# EAGLE board eccosorb_filter_v1-xld250 (EAGLE 9.3.0)
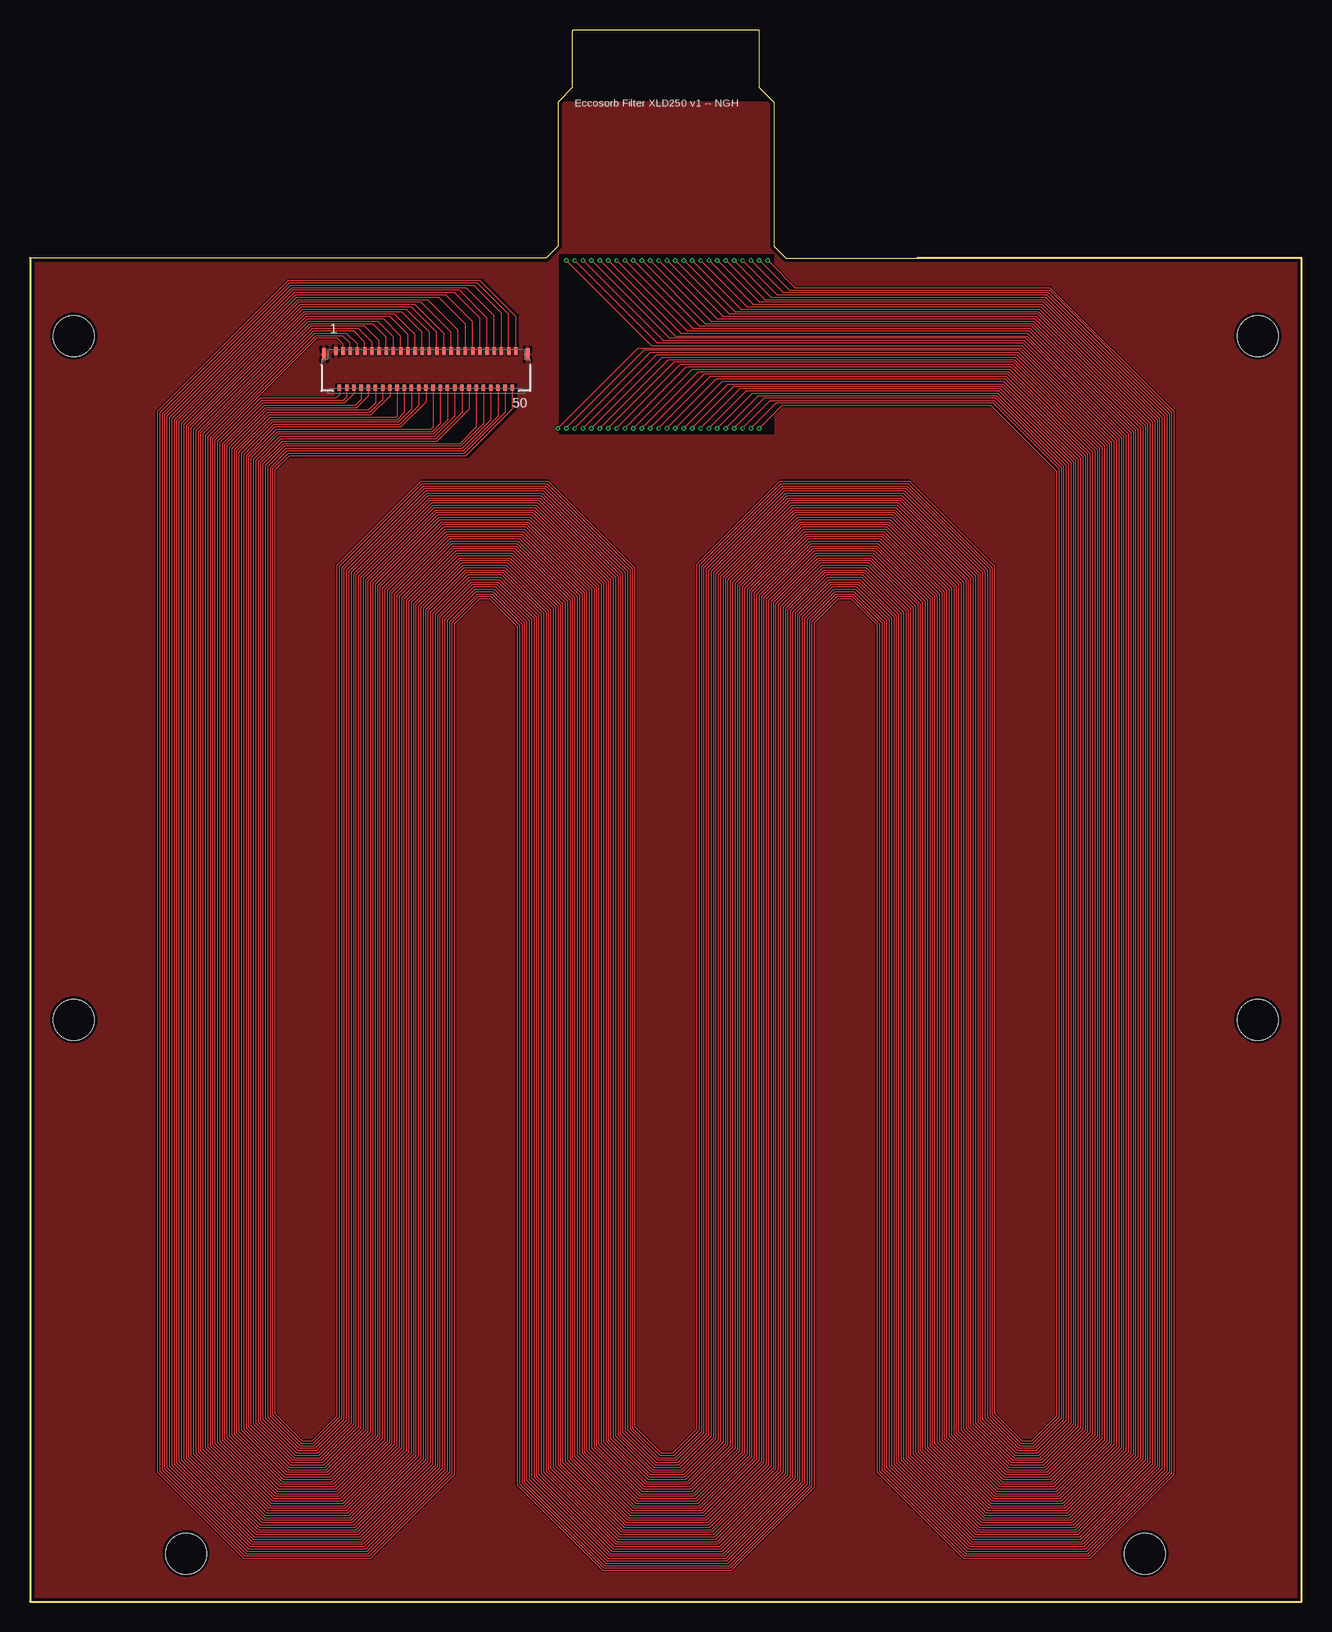
[diagram p0: board, top side]
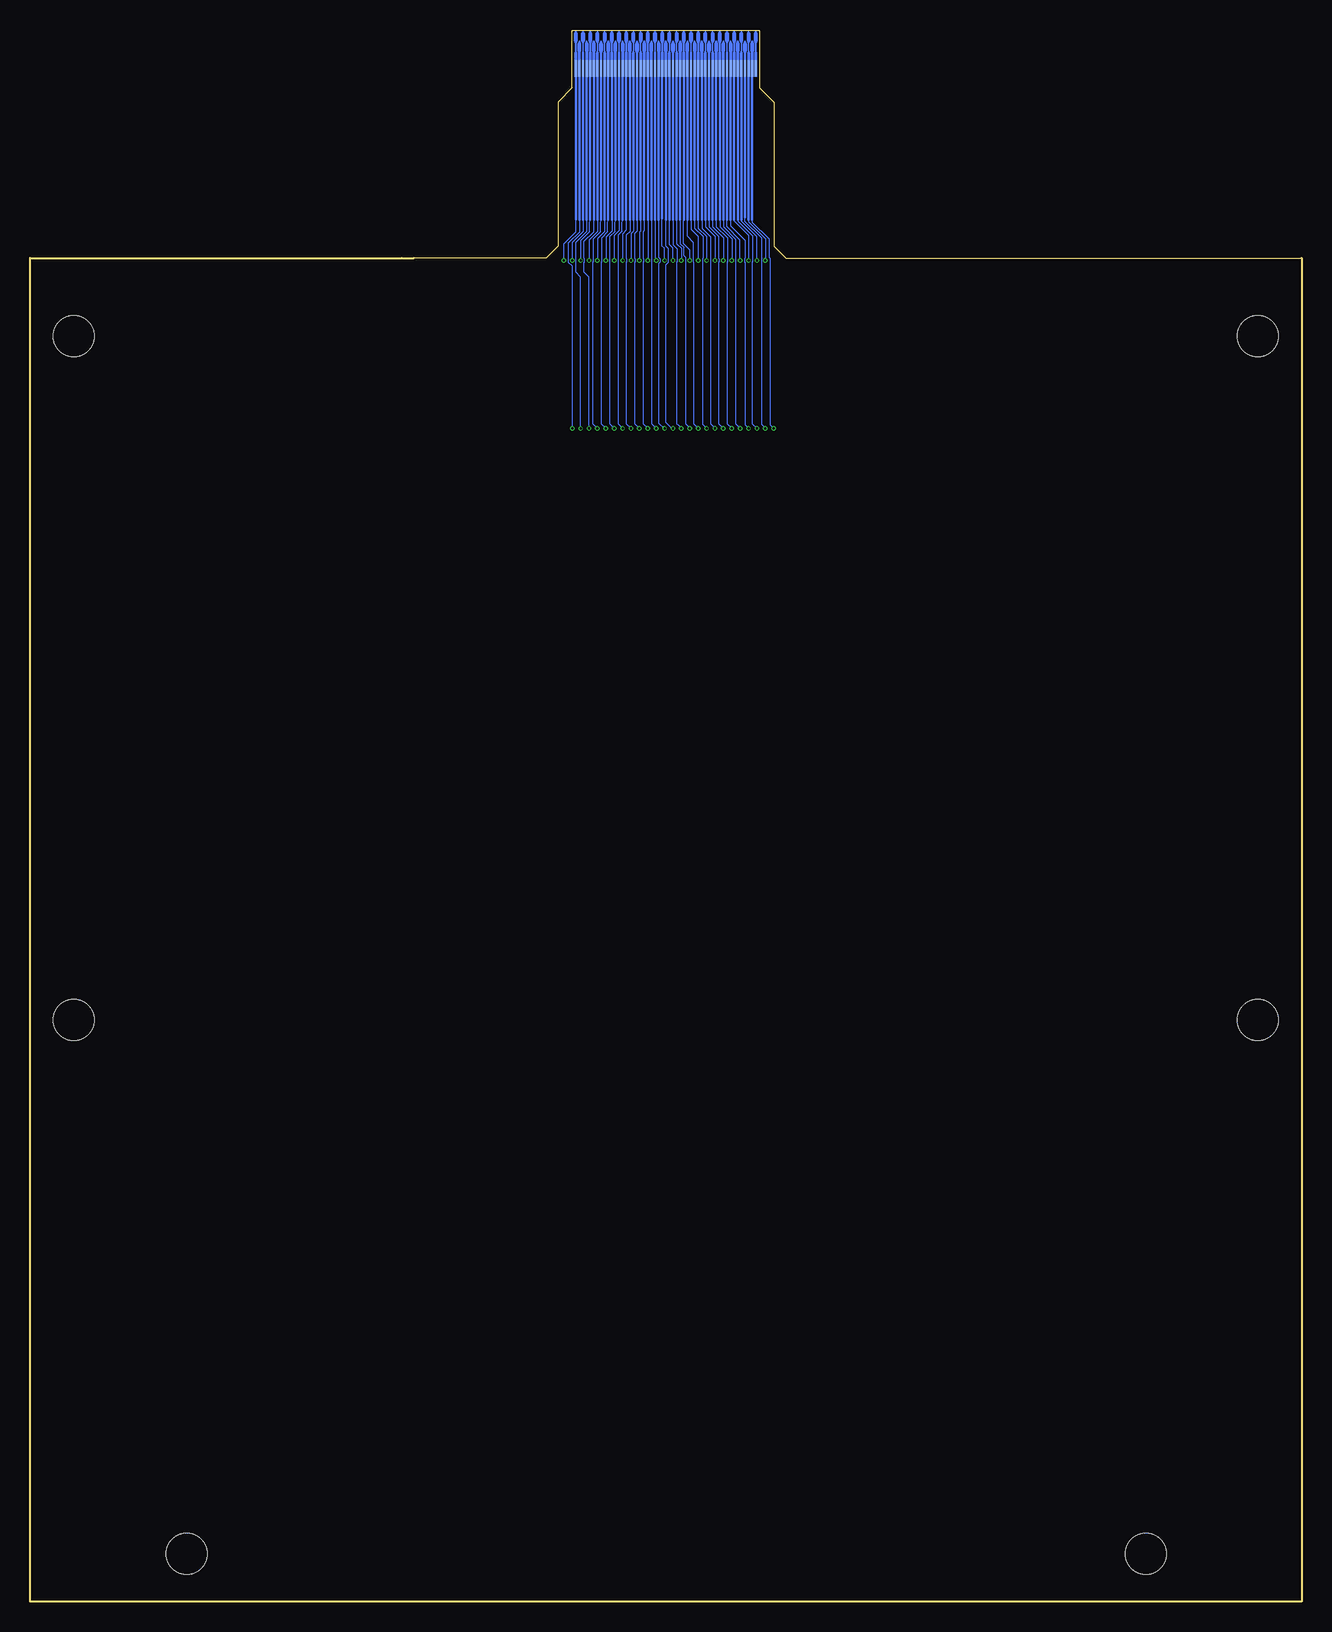
[diagram p1: board, bottom side, seen from below]

Size 106 x 131 mm. Coordinates in mm from the lower left corner, seen from the top.
Outline: 75,112 106,112 106,0 0,0 0,112 43,112 44,113 44,125 45.2,126.2 45.2,130.9 45.3,131 60.7,131 60.8,130.9 60.8,126.2 62,125 62,113 63,112 75,112
Outline: 75,112 74,112
Copper layers ((1*2)+(15*16)): Top 0.048259375mm / dielectric 0.18288125mm / Route2 0.035559375mm / dielectric 39mil / Route15 0.035559375mm / dielectric 0.18288125mm / Bottom 0.048259375mm
Design rules "default *": minimum track width 0.1mm, minimum drill 0.2mm, track to track 0.1mm, track to pad 0.1mm, pad to pad 0.1mm, via to via 0.1mm, smd to smd 0.1mm, copper to edge 10mil, drill to drill 10mil, minimum pad ring 3mil, minimum via ring 3mil, stop-mask expansion 4mil, vias tented up to drill 16mil, thermal gap 10mil
Net classes: 0 default: width 0.1 mm, drill 0.2 mm, clearance 0.1 mm
Holes 3.4 mm at 3.65,105.5 102.35,105.5 102.35,48.5 92.95,4 13,4 3.65,48.5
tRestrict: area 44.1,97.3 to 62,112.3; area 26,104.7 to 40.7,110.2; area 25.5,95.4 to 40.5,101.5
bRestrict: area 44.1,97.3 to 62,112.3

## Footprints (pad centres in the part's own frame; a part is rotated, then mirrored left to right if it is on the bottom)
MOLEX_502598-5193_0 = smd 0.3 x 0.67: 1 -7.5,-1.532; 3 -6.9,-1.532; 5 -6.3,-1.532; 7 -5.7,-1.532; 9 -5.1,-1.532; 11 -4.5,-1.532; 13 -3.9,-1.532; 15 -3.3,-1.532; 17 -2.7,-1.532; 19 -2.1,-1.532; 21 -1.5,-1.532; 23 -0.9,-1.532; 25 -0.3,-1.532; 27 0.3,-1.532; 29 0.9,-1.532; 31 1.5,-1.532; 33 2.1,-1.532; 35 2.7,-1.532; 37 3.3,-1.532; 39 3.9,-1.532; 41 4.5,-1.532; 43 5.1,-1.532; 45 5.7,-1.532; 47 6.3,-1.532; 49 6.9,-1.532; 51 7.5,-1.532 | smd 0.3 x 0.5: 2 -7.2,1.532; 4 -6.6,1.532; 6 -6,1.532; 8 -5.4,1.532; 10 -4.8,1.532; 12 -4.2,1.532; 14 -3.6,1.532; 16 -3,1.532; 18 -2.4,1.532; 20 -1.8,1.532; 22 -1.2,1.532; 24 -0.6,1.532; 26 0,1.532; 28 0.6,1.532; 30 1.2,1.532; 32 1.8,1.532; 34 2.4,1.532; 36 3,1.532; 38 3.6,1.532; 40 4.2,1.532; 42 4.8,1.532; 44 5.4,1.532; 46 6,1.532; 48 6.6,1.532; 50 7.2,1.532 | smd 0.35 x 1: MP1 -8.475,-1.267; MP2 8.475,-1.267
MOLEX_502598-5193-JUMPER = smd 0.2 x 1.4: 1 -7.5,-3.2; 2 -7.2,-3.2; 3 -6.9,-3.2; 4 -6.6,-3.2; 5 -6.3,-3.2; 6 -6,-3.2; 7 -5.7,-3.2; 8 -5.4,-3.2; 9 -5.1,-3.2; 10 -4.8,-3.2; 11 -4.5,-3.2; 12 -4.2,-3.2; 13 -3.9,-3.2; 14 -3.6,-3.2; 15 -3.3,-3.2; 16 -3,-3.2; 17 -2.7,-3.2; 18 -2.4,-3.2; 19 -2.1,-3.2; 20 -1.8,-3.2; 21 -1.5,-3.2; 22 -1.2,-3.2; 23 -0.9,-3.2; 24 -0.6,-3.2; 25 -0.3,-3.2; 26 0,-3.2; 27 0.3,-3.2; 28 0.6,-3.2; 29 0.9,-3.2; 30 1.2,-3.2; 31 1.5,-3.2; 32 1.8,-3.2; 33 2.1,-3.2; 34 2.4,-3.2; 35 2.7,-3.2; 36 3,-3.2; 37 3.3,-3.2; 38 3.6,-3.2; 39 3.9,-3.2; 40 4.2,-3.2; 41 4.5,-3.2; 42 4.8,-3.2; 43 5.1,-3.2; 44 5.4,-3.2; 45 5.7,-3.2; 46 6,-3.2; 47 6.3,-3.2; 48 6.6,-3.2; 49 6.9,-3.2; 50 7.2,-3.2; 51 7.5,-3.2

## Placement (x,y rotation side)
J2  MOLEX_502598-5193MOLEX_502598-5193_0_0  [MOLEX_502598-5193_0]  33,102.7 180 top
U$1  502598-5193_JUMPER  [MOLEX_502598-5193-JUMPER]  53,131 0 bottom

## Library data of the parts
J2 = Molex - 502598-5193; CIIVA_IDS: 8412513; CIRCUITS_LOADED: 51; COMPONENT_LINK_1_DESCRIPTION: Manufacturer URL; COMPONENT_LINK_1_URL: http://www.molex.com/molex/index.jsp; COMPONENT_LINK_3_DESCRIPTION: Package Specification; COMPONENT_LINK_3_URL: http://www.molex.com/pdm_docs/sd/5025985193_sd.pdf; CONTACT_POSITION: Dual; CURRENT_MAX_PER_CONTACT: 0.2A; DATASHEET: http://www.molex.com/webdocs/datasheets/pdf/en-us/5025985193_FFC_FPC_CONNECTORS.pdf; DURABILITY_MATING_CYCLES_MAX: 10; ENTRY_ANGLE: 90degrees Angle; FOOTPRINT_VARIANT_NAME_0: Manufacturer Recommended; IMPORTED: yes; IMPORTED_FROM: vault; IMPORT_TS: 1521860080; MATED_HEIGHT: 1.15mm; MATERIAL___METAL: Copper Alloy, Phosphor Bronze; MATERIAL___PLATING_MATING: Gold; MATERIAL___PLATING_TERMINATION: Gold, Tin; MF: Molex; MOUNTING_TECHNOLOGY: Surface Mount; MPN: 502598-5193; NUMBER_OF_ROWS: 1; ORIENTATION: Right Angle; PACKAGE: 502598-5193; PACKAGE_DESCRIPTION: 51-Lead FPC Connector, Pitch 0.3 mm; PACKAGE_VERSION: Rev. B, 08/2013; PACKING: Tape and Reel; PCB_LOCATOR: No; PCB_RETENTION: Yes; PITCH___MATING_INTERFACE: 0.30mm; POLARIZED_TO_PCB: Yes; PREFIX: J; RELEASE_DATE: 1411372322; ROHS: Yes; STACKABLE: No; VAULT_GUID: 79943B7E-3FDB-4B6C-B1B1-74E826A886CC; VAULT_REVISION: 2B392736-9C86-4257-9195-559BF0CEA94B; VOLTAGE_MAX: 50V AC (RMS)/DC
U$1 = molex_502598-5193-card

## Nets
2: J2.50 U$1.50
3: J2.49 U$1.49
4: J2.48 U$1.48
5: J2.47 U$1.47
6: J2.46 U$1.46
7: J2.45 U$1.45
8: J2.44 U$1.44
9: J2.43 U$1.43
10: J2.42 U$1.42
11: J2.41 U$1.41
12: J2.40 U$1.40
13: J2.39 U$1.39
14: J2.38 U$1.38
15: J2.37 U$1.37
16: J2.36 U$1.36
17: J2.35 U$1.35
18: J2.34 U$1.34
19: J2.33 U$1.33
20: J2.32 U$1.32
21: J2.31 U$1.31
22: J2.30 U$1.30
23: J2.29 U$1.29
24: J2.28 U$1.28
25: J2.27 U$1.27
26: J2.26 U$1.26
27: J2.25 U$1.25
28: J2.24 U$1.24
29: J2.23 U$1.23
30: J2.22 U$1.22
31: J2.21 U$1.21
32: J2.20 U$1.20
33: J2.19 U$1.19
34: J2.18 U$1.18
35: J2.17 U$1.17
36: J2.16 U$1.16
37: J2.15 U$1.15
38: J2.14 U$1.14
39: J2.13 U$1.13
40: J2.12 U$1.12
41: J2.11 U$1.11
42: J2.10 U$1.10
43: J2.9 U$1.9
44: J2.8 U$1.8
45: J2.7 U$1.7
46: J2.6 U$1.6
47: J2.5 U$1.5
48: J2.4 U$1.4
49: J2.3 U$1.3
50: J2.2 U$1.2
51: J2.1 U$1.1
GND: J2.51 J2.MP1 J2.MP2

## Tracks (layer width: path | path; a pad name or v marks a point on that pad's centre or on a via)
2  (via drill 0.2)
  Top 0.1: J2.50 25.8,100.6 25.5,100.3 19.2,100.3 15.6,96.7 15.6,13.3 20.3,8.6 25.9,8.6 30.4,13.1 30.4,84 35,88.6 40.8,88.6 45.6,83.8 45.6,12.2 50.2,7.6 56,7.6 60.4,12 60.4,84.1 64.9,88.6 70.9,88.6 75.6,83.9 75.6,13.3 80.3,8.6 85.9,8.6 90.4,13.1 90.4,96.7 82.6,104.5 50.7,104.5 v44,97.8
  Bottom 0.1: 45.8,115.2 45.8,115 44.4,113.6 44.4,112.06 44.3,111.96 44.3,111.64 44.3,111.6 44.3,98.1 v44,97.8
  Bottom 0.2: U$1.50 45.8,115.2
3  (via drill 0.2)
  Top 0.1: J2.49 26.1,104.8 25.6,105.3 23.9,105.3 15.4,96.8 15.4,13.2 20.2,8.4 26,8.4 30.6,13 30.6,83.9 35.1,88.4 40.7,88.4 45.4,83.7 45.4,12.1 50.1,7.4 56.1,7.4 60.6,11.9 60.6,84 65,88.4 70.8,88.4 75.4,83.8 75.4,13.2 80.2,8.4 86,8.4 90.6,13 90.6,96.8 82.7,104.7 51.8,104.7 v44.7,111.8
  Bottom 0.1: 46.1,115.2 46.1,115.02 44.7,113.62 v44.7,111.8
  Bottom 0.2: U$1.49 46.1,115.2
4  (via drill 0.2)
  Top 0.1: J2.48 26.4,100.4 26.1,100.1 19.3,100.1 15.8,96.6 15.8,13.4 20.4,8.8 25.8,8.8 30.2,13.2 30.2,84.1 34.9,88.8 40.9,88.8 45.8,83.9 45.8,12.3 50.3,7.8 55.9,7.8 60.2,12.1 60.2,84.2 64.8,88.8 71,88.8 75.8,84 75.8,13.4 80.4,8.8 85.8,8.8 90.2,13.2 90.2,96.6 82.5,104.3 51.2,104.3 v44.7,97.8
  Bottom 0.1: v44.7,97.8 45.03,98.13 45.03,111.94 45,111.96 45,113.63 46.4,115.03 46.4,115.4
  Bottom 0.2: 46.4,115.4 U$1.48
5  (via drill 0.2)
  Top 0.1: J2.47 26.7,104.9 26.1,105.5 23.8,105.5 15.2,96.9 15.2,13.1 20.1,8.2 26.1,8.2 30.8,12.9 30.8,83.8 35.2,88.2 40.6,88.2 45.2,83.6 45.2,12 50,7.2 56.2,7.2 60.8,11.8 60.8,83.9 65.1,88.2 70.7,88.2 75.2,83.7 75.2,13.1 80.1,8.2 86.1,8.2 90.8,12.9 90.8,96.9 82.8,104.9 52.3,104.9 v45.4,111.8
  Bottom 0.1: v45.4,111.8 45.4,113.75 46.7,115.05 46.7,115.2
  Bottom 0.2: 46.7,115.2 U$1.47
6  (via drill 0.2)
  Top 0.1: J2.46 27,100.7 26.2,99.9 19.4,99.9 16,96.5 16,13.5 20.5,9 25.7,9 30,13.3 30,84.2 34.8,89 41,89 46,84 46,12.4 50.4,8 55.8,8 60,12.2 60,84.3 64.7,89 71.1,89 76,84.1 76,13.5 80.5,9 85.7,9 90,13.3 90,96.5 82.4,104.1 51.7,104.1 v45.4,97.8
  Bottom 0.1: 47,115.2 47,115.07 45.77,113.84 45.77,111.66 45.8,111.64 45.8,98.2 v45.4,97.8
  Bottom 0.2: U$1.46 47,115.2
7  (via drill 0.2)
  Top 0.1: J2.45 27.3,104.8 26.4,105.7 23.7,105.7 15,97 15,13 20,8 26.2,8 31,12.8 31,83.7 35.3,88 40.5,88 45,83.5 45,11.9 49.9,7 56.3,7 61,11.7 61,83.8 65.2,88 70.6,88 75,83.6 75,13 80,8 86.2,8 91,12.8 91,97 82.9,105.1 52.8,105.1 v46.1,111.8
  Bottom 0.1: 47.3,115.2 47.3,115.09 46.1,113.89 v46.1,111.8
  Bottom 0.2: U$1.45 47.3,115.2
8  (via drill 0.2)
  Top 0.1: J2.44 27.6,100.2 27.1,99.7 19.5,99.7 16.2,96.4 16.2,13.6 20.6,9.2 25.6,9.2 29.8,13.4 29.8,84.3 34.7,89.2 41.1,89.2 46.2,84.1 46.2,12.5 50.5,8.2 55.7,8.2 59.8,12.3 59.8,84.4 64.6,89.2 71.2,89.2 76.2,84.2 76.2,13.6 80.6,9.2 85.6,9.2 89.8,13.4 89.8,96.4 82.3,103.9 52.2,103.9 v46.1,97.8
  Bottom 0.1: 47.6,115.2 47.6,114.7 46.4,113.5 46.4,111.96 46.43,111.94 46.43,111.66 46.4,111.64 46.4,98.1 v46.1,97.8
  Bottom 0.2: U$1.44 47.6,115.2
9  (via drill 0.2)
  Top 0.1: J2.43 27.9,105 27,105.9 23.6,105.9 14.8,97.1 14.8,12.9 19.9,7.8 26.3,7.8 31.2,12.7 31.2,83.6 35.4,87.8 40.4,87.8 44.8,83.4 44.8,11.8 49.8,6.8 56.4,6.8 61.2,11.6 61.2,83.7 65.3,87.8 70.5,87.8 74.8,83.5 74.8,12.9 79.9,7.8 86.3,7.8 91.2,12.7 91.2,97.1 83,105.3 53.3,105.3 v46.8,111.8
  Bottom 0.1: v46.8,111.8 46.8,113.5 47.9,114.6 47.9,115.2
  Bottom 0.2: 47.9,115.2 U$1.43
10  (via drill 0.2)
  Top 0.1: J2.42 28.2,100.5 27.2,99.5 19.6,99.5 16.4,96.3 16.4,13.7 20.7,9.4 25.5,9.4 29.6,13.5 29.6,84.4 34.6,89.4 41.2,89.4 46.4,84.2 46.4,12.6 50.6,8.4 55.6,8.4 59.6,12.4 59.6,84.5 64.5,89.4 71.3,89.4 76.4,84.3 76.4,13.7 80.7,9.4 85.5,9.4 89.6,13.5 89.6,96.3 82.2,103.7 52.7,103.7 v46.8,97.8
  Bottom 0.1: 48.2,115.2 48.2,114.6 47.17,113.57 47.17,111.66 47.2,111.64 47.2,98.2 v46.8,97.8
  Bottom 0.2: U$1.42 48.2,115.2
11  (via drill 0.2)
  Top 0.1: J2.41 28.5,105 27.4,106.1 23.5,106.1 14.6,97.2 14.6,12.8 19.8,7.6 26.4,7.6 31.4,12.6 31.4,83.5 35.5,87.6 40.3,87.6 44.6,83.3 44.6,11.7 49.7,6.6 56.5,6.6 61.4,11.5 61.4,83.6 65.4,87.6 70.4,87.6 74.6,83.4 74.6,12.8 79.8,7.6 86.4,7.6 91.4,12.6 91.4,97.2 83.1,105.5 53.8,105.5 v47.5,111.8
  Bottom 0.1: 48.5,115.2 48.5,114.62 47.5,113.62 v47.5,111.8
  Bottom 0.2: U$1.41 48.5,115.2
12  (via drill 0.2)
  Top 0.1: J2.40 28.8,99.9 28.2,99.3 19.7,99.3 16.6,96.2 16.6,13.8 20.8,9.6 25.4,9.6 29.4,13.6 29.4,84.5 34.5,89.6 41.3,89.6 46.6,84.3 46.6,12.7 50.7,8.6 55.5,8.6 59.4,12.5 59.4,84.6 64.4,89.6 71.4,89.6 76.6,84.4 76.6,13.8 80.8,9.6 85.4,9.6 89.4,13.6 89.4,96.2 82.1,103.5 53.2,103.5 v47.5,97.8
  Bottom 0.1: 48.8,115.2 48.8,114.6 47.87,113.67 47.87,111.66 47.9,111.64 47.9,98.2 v47.5,97.8
  Bottom 0.2: U$1.40 48.8,115.2
13  (via drill 0.2)
  Top 0.1: J2.39 29.1,105.1 27.9,106.3 23.4,106.3 14.4,97.3 14.4,12.7 19.7,7.4 26.5,7.4 31.6,12.5 31.6,83.4 35.6,87.4 40.2,87.4 44.4,83.2 44.4,11.6 49.6,6.4 56.6,6.4 61.6,11.4 61.6,83.5 65.5,87.4 70.3,87.4 74.4,83.3 74.4,12.7 79.7,7.4 86.5,7.4 91.6,12.5 91.6,97.3 83.2,105.7 54.3,105.7 v48.2,111.8
  Bottom 0.1: 49.1,115.2 49.1,114.6 48.2,113.7 v48.2,111.8
  Bottom 0.2: U$1.39 49.1,115.2
14  (via drill 0.2)
  Top 0.1: J2.38 29.4,100.2 28.3,99.1 19.8,99.1 16.8,96.1 16.8,13.9 20.9,9.8 25.3,9.8 29.2,13.7 29.2,84.6 34.4,89.8 41.4,89.8 46.8,84.4 46.8,12.8 50.8,8.8 55.4,8.8 59.2,12.6 59.2,84.7 64.3,89.8 71.5,89.8 76.8,84.5 76.8,13.9 80.9,9.8 85.3,9.8 89.2,13.7 89.2,96.1 82,103.3 53.7,103.3 v48.2,97.8
  Bottom 0.1: 49.4,115.2 49.4,114.6 48.6,113.8 48.6,111.96 48.57,111.94 48.57,111.66 48.6,111.64 48.6,98.2 v48.2,97.8
  Bottom 0.2: U$1.38 49.4,115.2
15  (via drill 0.2)
  Top 0.1: J2.37 29.7,105.4 28.6,106.5 23.3,106.5 14.2,97.4 14.2,12.6 19.6,7.2 26.6,7.2 31.8,12.4 31.8,83.3 35.7,87.2 40.1,87.2 44.2,83.1 44.2,11.5 49.5,6.2 56.7,6.2 61.8,11.3 61.8,83.4 65.6,87.2 70.2,87.2 74.2,83.2 74.2,12.6 79.6,7.2 86.6,7.2 91.8,12.4 91.8,97.4 83.3,105.9 54.8,105.9 v48.9,111.8
  Bottom 0.1: 49.7,115.2 49.7,114.62 48.89,113.81 v48.89,111.81 v48.9,111.8
  Bottom 0.2: U$1.37 49.7,115.2
16  (via drill 0.2)
  Top 0.1: J2.36 30,100.5 28.4,98.9 19.9,98.9 17,96 17,14 21,10 25.2,10 29,13.8 29,84.7 34.3,90 41.5,90 47,84.5 47,12.9 50.9,9 55.3,9 59,12.7 59,84.8 64.2,90 71.6,90 77,84.6 77,14 81,10 85.2,10 89,13.8 89,96 81.9,103.1 54.2,103.1 v48.9,97.8
  Bottom 0.1: 50,115.2 50,114.5 49.27,113.77 49.27,98.17 v48.9,97.8
  Bottom 0.2: U$1.36 50,115.2
17  (via drill 0.2)
  Top 0.1: J2.35 30.3,105.4 29,106.7 23.2,106.7 14,97.5 14,12.5 19.5,7 26.7,7 32,12.3 32,83.2 35.8,87 40,87 44,83 44,11.4 49.4,6 56.8,6 62,11.2 62,83.3 65.7,87 70.1,87 74,83.1 74,12.5 79.5,7 86.7,7 92,12.3 92,97.5 83.4,106.1 55.3,106.1 v49.6,111.8
  Bottom 0.1: 50.3,115.2 50.3,114.5 49.6,113.8 v49.6,111.8
  Bottom 0.2: U$1.35 50.3,115.2
18  (via drill 0.2)
  Top 0.1: J2.34 30.6,98.8 30.5,98.7 20,98.7 17.2,95.9 17.2,14.1 21.1,10.2 25.1,10.2 28.8,13.9 28.8,84.8 34.2,90.2 41.6,90.2 47.2,84.6 47.2,13 51,9.2 55.2,9.2 58.8,12.8 58.8,84.9 64.1,90.2 71.7,90.2 77.2,84.7 77.2,14.1 81.1,10.2 85.1,10.2 88.8,13.9 88.8,95.9 81.8,102.9 54.7,102.9 v49.6,97.8
  Bottom 0.1: 50.6,115.2 50.6,114.5 49.9,113.8 49.9,111.96 49.93,111.94 49.93,98.13 v49.6,97.8
  Bottom 0.2: U$1.34 50.6,115.2
19  (via drill 0.2)
  Top 0.1: J2.33 30.9,105.5 29.5,106.9 23.1,106.9 13.8,97.6 13.8,12.4 19.4,6.8 26.8,6.8 32.2,12.2 32.2,83.1 35.9,86.8 39.9,86.8 43.8,82.9 43.8,11.3 49.3,5.8 56.9,5.8 62.2,11.1 62.2,83.2 65.8,86.8 70,86.8 73.8,83 73.8,12.4 79.4,6.8 86.8,6.8 92.2,12.2 92.2,97.6 83.5,106.3 55.8,106.3 v50.3,111.8
  Bottom 0.1: 50.9,115.2 50.9,114.4 50.3,113.8 v50.3,111.8
  Bottom 0.2: U$1.33 50.9,115.2
20  (via drill 0.2)
  Top 0.1: J2.32 31.2,99.1 30.6,98.5 20.1,98.5 17.4,95.8 17.4,14.2 21.2,10.4 25,10.4 28.6,14 28.6,84.9 34.1,90.4 41.7,90.4 47.4,84.7 47.4,13.1 51.1,9.4 55.1,9.4 58.6,12.9 58.6,85 64,90.4 71.8,90.4 77.4,84.8 77.4,14.2 81.2,10.4 85,10.4 88.6,14 88.6,95.8 81.7,102.7 55.2,102.7 v50.3,97.8
  Bottom 0.1: v50.3,97.8 50.7,98.2 50.7,111.64 50.67,111.66 50.67,113.27 51.2,113.8 51.2,115.2
  Bottom 0.2: U$1.32 51.2,115.2
21  (via drill 0.2)
  Top 0.1: J2.31 31.5,105.6 30,107.1 23,107.1 13.6,97.7 13.6,12.3 19.3,6.6 26.9,6.6 32.4,12.1 32.4,83 36,86.6 39.8,86.6 43.6,82.8 43.6,11.2 49.2,5.6 57,5.6 62.4,11 62.4,83.1 65.9,86.6 69.9,86.6 73.6,82.9 73.6,12.3 79.3,6.6 86.9,6.6 92.4,12.1 92.4,97.7 83.6,106.5 56.3,106.5 v51,111.8
  Bottom 0.1: v51,111.8 51,112.67 51.52,113.18 51.52,115.18 51.5,115.2
  Bottom 0.2: 51.5,115.2 U$1.31
22  (via drill 0.2)
  Top 0.1: J2.30 31.8,99.4 30.7,98.3 20.2,98.3 17.6,95.7 17.6,14.3 21.3,10.6 24.9,10.6 28.4,14.1 28.4,85 34,90.6 41.8,90.6 47.6,84.8 47.6,13.2 51.2,9.6 55,9.6 58.4,13 58.4,85.1 63.9,90.6 71.9,90.6 77.6,84.9 77.6,14.3 81.3,10.6 84.9,10.6 88.4,14.1 88.4,95.7 81.6,102.5 55.7,102.5 v51,97.8
  Bottom 0.1: v51,97.8 51.33,98.13 51.33,112.03 51.5,112.2 51.5,112.88 51.8,113.18 51.8,115.2
  Bottom 0.2: U$1.30 51.8,115.2
23  (via drill 0.2)
  Top 0.1: J2.29 32.1,105.6 30.4,107.3 22.9,107.3 13.4,97.8 13.4,12.2 19.2,6.4 27,6.4 32.6,12 32.6,82.9 36.1,86.4 39.7,86.4 43.4,82.7 43.4,11.1 49.1,5.4 57.1,5.4 62.6,10.9 62.6,83 66,86.4 69.8,86.4 73.4,82.8 73.4,12.2 79.2,6.4 87,6.4 92.6,12 92.6,97.8 83.7,106.7 56.8,106.7 v51.7,111.8
  Bottom 0.1: 52.1,115.2 52.1,113.2 51.7,112.8 v51.7,111.8
  Bottom 0.2: U$1.29 52.1,115.2
24  (via drill 0.2)
  Top 0.1: J2.28 32.4,99.7 30.8,98.1 20.3,98.1 17.8,95.6 17.8,14.4 21.4,10.8 24.8,10.8 28.2,14.2 28.2,85.1 33.9,90.8 41.9,90.8 47.8,84.9 47.8,13.3 51.3,9.8 54.9,9.8 58.2,13.1 58.2,85.2 63.8,90.8 72,90.8 77.8,85 77.8,14.4 81.4,10.8 84.8,10.8 88.2,14.2 88.2,95.6 81.5,102.3 56.2,102.3 v51.7,97.8
  Bottom 0.1: 52.4,115.2 52.4,113.1 52.07,112.77 52.07,111.66 52.1,111.64 52.1,98.2 51.95,98.05 v51.7,97.8
  Bottom 0.2: U$1.28 52.4,115.2
25  (via drill 0.2)
  Top 0.1: J2.27 32.7,105.8 31,107.5 22.8,107.5 13.2,97.9 13.2,12.1 19.1,6.2 27.1,6.2 32.8,11.9 32.8,82.8 36.2,86.2 39.6,86.2 43.2,82.6 43.2,11 49,5.2 57.2,5.2 62.8,10.8 62.8,82.9 66.1,86.2 69.7,86.2 73.2,82.7 73.2,12.1 79.1,6.2 87.1,6.2 92.8,11.9 92.8,97.9 83.8,106.9 57.3,106.9 v52.4,111.8
  Bottom 0.1: 52.7,115.2 52.7,113.1 52.4,112.8 v52.4,111.8
  Bottom 0.2: U$1.27 52.7,115.2
26  (via drill 0.2)
  Top 0.1: J2.26 33,100 30.9,97.9 20.4,97.9 18,95.5 18,14.5 21.5,11 24.7,11 28,14.3 28,85.2 33.8,91 42,91 48,85 48,13.4 51.4,10 54.8,10 58,13.2 58,85.3 63.7,91 72.1,91 78,85.1 78,14.5 81.5,11 84.7,11 88,14.3 88,95.5 81.4,102.1 56.7,102.1 v52.4,97.8
  Bottom 0.1: v52.4,97.8 52.52,97.8 53,98.28 53,111.44 52.77,111.66 52.77,112.77 53,113 53,115.2
  Bottom 0.2: 53,115.2 U$1.26
27  (via drill 0.2)
  Top 0.1: J2.25 33.3,105.8 31.4,107.7 22.7,107.7 13,98 13,12 19,6 27.2,6 33,11.8 33,82.7 36.3,86 39.5,86 43,82.5 43,10.9 48.9,5 57.3,5 63,10.7 63,82.8 66.2,86 69.6,86 73,82.6 73,12 79,6 87.2,6 93,11.8 93,98 83.9,107.1 57.8,107.1 v53.1,111.8
  Bottom 0.1: v53.1,111.8 53.1,112.8 53.3,113 53.3,115.3
  Bottom 0.2: U$1.25 53.3,115.3
28  (via drill 0.2)
  Top 0.1: J2.24 33.6,97.9 33.4,97.7 20.5,97.7 18.2,95.4 18.2,14.6 21.6,11.2 24.6,11.2 27.8,14.4 27.8,85.3 33.7,91.2 42.1,91.2 48.2,85.1 48.2,13.5 51.5,10.2 54.7,10.2 57.8,13.3 57.8,85.4 63.6,91.2 72.2,91.2 78.2,85.2 78.2,14.6 81.6,11.2 84.6,11.2 87.8,14.4 87.8,95.4 81.3,101.9 57.2,101.9 v53.1,97.8
  Bottom 0.1: v53.1,97.8 53.16,97.8 53.6,98.24 53.6,111.54 53.47,111.66 53.47,111.94 53.6,112.06 53.6,115.2
  Bottom 0.2: U$1.24 53.6,115.2
29  (via drill 0.2)
  Top 0.1: J2.23 33.9,105.8 31.8,107.9 22.6,107.9 12.8,98.1 12.8,11.9 18.9,5.8 27.3,5.8 33.2,11.7 33.2,82.6 36.4,85.8 39.4,85.8 42.8,82.4 42.8,10.8 48.8,4.8 57.4,4.8 63.2,10.6 63.2,82.7 66.3,85.8 69.5,85.8 72.8,82.5 72.8,11.9 78.9,5.8 87.3,5.8 93.2,11.7 93.2,98.1 84,107.3 58.3,107.3 v53.8,111.8
  Bottom 0.1: 53.9,115.2 53.9,111.9 v53.8,111.8
  Bottom 0.2: U$1.23 53.9,115.2
30  (via drill 0.2)
  Top 0.1: J2.22 34.2,98.2 33.5,97.5 20.6,97.5 18.4,95.3 18.4,14.7 21.7,11.4 24.5,11.4 27.6,14.5 27.6,85.4 33.6,91.4 42.2,91.4 48.4,85.2 48.4,13.6 51.6,10.4 54.6,10.4 57.6,13.4 57.6,85.5 63.5,91.4 72.3,91.4 78.4,85.3 78.4,14.7 81.7,11.4 84.5,11.4 87.6,14.5 87.6,95.3 81.2,101.7 57.7,101.7 v53.8,97.8
  Bottom 0.1: 54.2,115.2 54.2,111.96 54.17,111.94 54.17,111.66 54.2,111.64 54.2,98.2 v53.8,97.8
  Bottom 0.2: U$1.22 54.2,115.2
31  (via drill 0.2)
  Top 0.1: J2.21 34.5,105.7 32.1,108.1 22.5,108.1 12.6,98.2 12.6,11.8 18.8,5.6 27.4,5.6 33.4,11.6 33.4,82.5 36.5,85.6 39.3,85.6 42.6,82.3 42.6,10.7 48.7,4.6 57.5,4.6 63.4,10.5 63.4,82.6 66.4,85.6 69.4,85.6 72.6,82.4 72.6,11.8 78.8,5.6 87.4,5.6 93.4,11.6 93.4,98.2 84.1,107.5 58.8,107.5 v54.5,111.8
  Bottom 0.1: 54.5,115.2 v54.5,111.8
  Bottom 0.2: U$1.21 54.5,115.2
32  (via drill 0.2)
  Top 0.1: J2.20 34.8,98.5 33.6,97.3 20.7,97.3 18.6,95.2 18.6,14.8 21.8,11.6 24.4,11.6 27.4,14.6 27.4,85.5 33.5,91.6 42.3,91.6 48.6,85.3 48.6,13.7 51.7,10.6 54.5,10.6 57.4,13.5 57.4,85.6 63.4,91.6 72.4,91.6 78.6,85.4 78.6,14.8 81.8,11.6 84.4,11.6 87.4,14.6 87.4,95.2 81.1,101.5 58.2,101.5 v54.5,97.8
  Bottom 0.1: 54.8,115.2 54.8,114.27 54.9,114.17 54.9,111.96 54.87,111.94 54.87,111.66 54.9,111.64 54.9,98.2 v54.5,97.8
  Bottom 0.2: U$1.20 54.8,115.2
33  (via drill 0.2)
  Top 0.1: J2.19 35.1,105.8 32.6,108.3 22.4,108.3 12.4,98.3 12.4,11.7 18.7,5.4 27.5,5.4 33.6,11.5 33.6,82.4 36.6,85.4 39.2,85.4 42.4,82.2 42.4,10.6 48.6,4.4 57.6,4.4 63.6,10.4 63.6,82.5 66.5,85.4 69.3,85.4 72.4,82.3 72.4,11.7 78.7,5.4 87.5,5.4 93.6,11.5 93.6,98.3 84.2,107.7 59.3,107.7 v55.2,111.8
  Bottom 0.1: 55.1,115.2 55.1,114.25 55.2,114.15 v55.2,111.8
  Bottom 0.2: U$1.19 55.1,115.2
34  (via drill 0.2)
  Top 0.1: J2.18 35.4,98.8 33.7,97.1 20.8,97.1 18.8,95.1 18.8,14.9 21.9,11.8 24.3,11.8 27.2,14.7 27.2,85.6 33.4,91.8 42.4,91.8 48.8,85.4 48.8,13.8 51.8,10.8 54.4,10.8 57.2,13.6 57.2,85.7 63.3,91.8 72.5,91.8 78.8,85.5 78.8,14.9 81.9,11.8 84.3,11.8 87.2,14.7 87.2,95.1 81,101.3 58.7,101.3 v55.2,97.8
  Bottom 0.1: 55.4,115.2 55.4,114.23 55.6,114.03 55.6,111.96 55.57,111.94 55.57,111.66 55.6,111.64 55.6,98.2 v55.2,97.8
  Bottom 0.2: U$1.18 55.4,115.2
35  (via drill 0.2)
  Top 0.1: J2.17 35.7,106 33.2,108.5 22.3,108.5 12.2,98.4 12.2,11.6 18.6,5.2 27.6,5.2 33.8,11.4 33.8,82.3 36.7,85.2 39.1,85.2 42.2,82.1 42.2,10.5 48.5,4.2 57.7,4.2 63.8,10.3 63.8,82.4 66.6,85.2 69.2,85.2 72.2,82.2 72.2,11.6 78.6,5.2 87.6,5.2 93.8,11.4 93.8,98.4 84.3,107.9 59.8,107.9 v55.9,111.8
  Bottom 0.1: 55.7,115.2 55.7,114.21 55.9,114.01 v55.9,111.8
  Bottom 0.2: U$1.17 55.7,115.2
36  (via drill 0.2)
  Top 0.1: J2.16 36,99.1 33.8,96.9 20.9,96.9 19,95 19,15 22,12 24.2,12 27,14.8 27,85.7 33.3,92 42.5,92 49,85.5 49,13.9 51.9,11 54.3,11 57,13.7 57,85.8 63.2,92 72.6,92 79,85.6 79,15 82,12 84.2,12 87,14.8 87,95 80.9,101.1 59.2,101.1 v55.9,97.8
  Bottom 0.1: 56,115.2 56,114.2 56.3,113.9 56.3,111.96 56.27,111.94 56.27,111.66 56.3,111.64 56.3,98.2 v55.9,97.8
  Bottom 0.2: U$1.16 56,115.2
37  (via drill 0.2)
  Top 0.1: J2.15 36.3,106.5 34.1,108.7 22.2,108.7 12,98.5 12,11.5 18.5,5 27.7,5 34,11.3 34,82.2 36.8,85 39,85 42,82 42,10.4 48.4,4 57.8,4 64,10.2 64,82.3 66.7,85 69.1,85 72,82.1 72,11.5 78.5,5 87.7,5 94,11.3 94,98.5 84.4,108.1 60.3,108.1 v56.6,111.8
  Bottom 0.1: 56.3,115.2 56.3,114.3 56.6,114 v56.6,111.8
  Bottom 0.2: U$1.15 56.3,115.2
38  (via drill 0.2)
  Top 0.1: J2.14 36.6,99.4 33.9,96.7 21,96.7 19.2,94.9 19.2,15.1 22.1,12.2 24.1,12.2 26.8,14.9 26.8,85.8 33.2,92.2 42.6,92.2 49.2,85.6 49.2,14 52,11.2 54.2,11.2 56.8,13.8 56.8,85.9 63.1,92.2 72.7,92.2 79.2,85.7 79.2,15.1 82.1,12.2 84.1,12.2 86.8,14.9 86.8,94.9 80.8,100.9 59.7,100.9 v56.6,97.8
  Bottom 0.1: v56.6,97.8 57,98.2 57,111.64 56.97,111.66 56.97,113.91 56.65,114.24 56.65,115 56.6,115.05 56.6,115.2
  Bottom 0.2: 56.6,115.2 U$1.14
39  (via drill 0.2)
  Top 0.1: J2.13 36.9,106.7 34.7,108.9 22.1,108.9 11.8,98.6 11.8,11.4 18.4,4.8 27.8,4.8 34.2,11.2 34.2,82.1 36.9,84.8 38.9,84.8 41.8,81.9 41.8,10.3 48.3,3.8 57.9,3.8 64.2,10.1 64.2,82.2 66.8,84.8 69,84.8 71.8,82 71.8,11.4 78.4,4.8 87.8,4.8 94.2,11.2 94.2,98.6 84.5,108.3 60.8,108.3 v57.3,111.8
  Bottom 0.1: 56.9,115.2 56.9,114.27 57.3,113.87 v57.3,111.8
  Bottom 0.2: U$1.13 56.9,115.2
40  (via drill 0.2)
  Top 0.1: J2.12 37.2,97.9 35.8,96.5 21.1,96.5 19.4,94.8 19.4,15.2 22.2,12.4 24,12.4 26.6,15 26.6,85.9 33.1,92.4 42.7,92.4 49.4,85.7 49.4,14.1 52.1,11.4 54.1,11.4 56.6,13.9 56.6,86 63,92.4 72.8,92.4 79.4,85.8 79.4,15.2 82.2,12.4 84,12.4 86.6,15 86.6,94.8 80.7,100.7 60.2,100.7 v57.3,97.8
  Bottom 0.1: v57.3,97.8 57.7,98.2 57.7,111.64 57.67,111.66 57.67,113.78 57.25,114.2 57.25,115 57.2,115.05 57.2,115.2
  Bottom 0.2: 57.2,115.2 U$1.12
41  (via drill 0.2)
  Top 0.1: J2.11 37.5,107 35.4,109.1 22,109.1 11.6,98.7 11.6,11.3 18.3,4.6 27.9,4.6 34.4,11.1 34.4,82 37,84.6 38.8,84.6 41.6,81.8 41.6,10.2 48.2,3.6 58,3.6 64.4,10 64.4,82.1 66.9,84.6 68.9,84.6 71.6,81.9 71.6,11.3 78.3,4.6 87.9,4.6 94.4,11.1 94.4,98.7 84.6,108.5 61.3,108.5 v58,111.8
  Bottom 0.1: 57.5,115.2 57.5,114.23 58,113.73 v58,111.8
  Bottom 0.2: U$1.11 57.5,115.2
42  (via drill 0.2)
  Top 0.1: J2.10 37.8,98.2 35.9,96.3 21.2,96.3 19.6,94.7 19.6,15.3 22.3,12.6 23.9,12.6 26.4,15.1 26.4,86 33,92.6 42.8,92.6 49.6,85.8 49.6,14.2 52.2,11.6 54,11.6 56.4,14 56.4,86.1 62.9,92.6 72.9,92.6 79.6,85.9 79.6,15.3 82.3,12.6 83.9,12.6 86.4,15.1 86.4,94.7 80.6,100.5 60.7,100.5 v58,97.8
  Bottom 0.1: v58,97.8 58.4,98.2 58.4,111.64 58.37,111.66 58.37,113.64 57.85,114.17 57.85,115 57.8,115.05 57.8,115.2
  Bottom 0.2: 57.8,115.2 U$1.10
43  (via drill 0.2)
  Top 0.1: J2.9 38.1,107 35.8,109.3 21.9,109.3 11.4,98.8 11.4,11.2 18.2,4.4 28,4.4 34.6,11 34.6,81.9 37.1,84.4 38.7,84.4 41.4,81.7 41.4,10.1 48.1,3.4 58.1,3.4 64.6,9.9 64.6,82 67,84.4 68.8,84.4 71.4,81.8 71.4,11.2 78.2,4.4 88,4.4 94.6,11 94.6,98.8 84.7,108.7 61.8,108.7 v58.7,111.8
  Bottom 0.1: 58.1,115.2 58.1,114.2 58.7,113.6 v58.7,111.8
  Bottom 0.2: U$1.9 58.1,115.2
44  (via drill 0.2)
  Top 0.1: J2.8 38.4,98.5 36,96.1 21.3,96.1 19.8,94.6 19.8,15.4 22.4,12.8 23.8,12.8 26.2,15.2 26.2,86.1 32.9,92.8 42.9,92.8 49.8,85.9 49.8,14.3 52.3,11.8 53.9,11.8 56.2,14.1 56.2,86.2 62.8,92.8 73,92.8 79.8,86 79.8,15.4 82.4,12.8 83.8,12.8 86.2,15.2 86.2,94.6 80.5,100.3 61.2,100.3 v58.7,97.8
  Bottom 0.1: v58.7,97.8 59.1,98.2 59.1,111.64 59.07,111.66 59.07,113.54 58.45,114.17 58.45,115 58.4,115.05 58.4,115.2
  Bottom 0.2: 58.4,115.2 U$1.8
45  (via drill 0.2)
  Top 0.1: J2.7 38.7,107.2 36.4,109.5 21.8,109.5 11.2,98.9 11.2,11.1 18.1,4.2 28.1,4.2 34.8,10.9 34.8,81.8 37.2,84.2 38.6,84.2 41.2,81.6 41.2,10 48,3.2 58.2,3.2 64.8,9.8 64.8,81.9 67.1,84.2 68.7,84.2 71.2,81.7 71.2,11.1 78.1,4.2 88.1,4.2 94.8,10.9 94.8,98.9 84.8,108.9 62.3,108.9 v59.4,111.8
  Bottom 0.1: 58.7,115.2 58.7,114.2 59.4,113.5 v59.4,111.8
  Bottom 0.2: U$1.7 58.7,115.2
46  (via drill 0.2)
  Top 0.1: J2.6 39,98.8 36.1,95.9 21.4,95.9 20,94.5 20,15.5 22.5,13 23.7,13 26,15.3 26,86.2 32.8,93 43,93 50,86 50,14.4 52.4,12 53.8,12 56,14.2 56,86.3 62.7,93 73.1,93 80,86.1 80,15.5 82.5,13 83.7,13 86,15.3 86,94.5 80.55,99.95 80.4,100.1 61.7,100.1 v59.4,97.8
  Bottom 0.1: v59.4,97.8 59.4,110.4 59.8,110.8 59.8,111.64 59.77,111.66 59.77,111.94 59.8,111.96 59.8,113.4 59,114.2 59,115.2
  Bottom 0.2: 59,115.2 U$1.6
47  (via drill 0.2)
  Top 0.1: J2.5 39.3,107.4 37,109.7 21.7,109.7 11,99 11,11 18,4 28.2,4 35,10.8 35,81.7 37.3,84 38.5,84 41,81.5 41,9.9 47.9,3 58.3,3 65,9.7 65,81.8 67.2,84 68.6,84 71,81.6 71,11 78,4 88.2,4 95,10.8 95,99 84.9,109.1 62.8,109.1 v60.1,111.8
  Bottom 0.1: v60.1,111.8 60.1,113.42 59.35,114.17 59.35,115 59.3,115.05 59.3,115.2
  Bottom 0.2: 59.3,115.2 U$1.5
48  (via drill 0.2)
  Top 0.1: J2.4 39.6,99.1 36.2,95.7 21.5,95.7 20.2,94.4 20.2,15.6 22.6,13.2 23.6,13.2 25.8,15.4 25.8,86.3 32.7,93.2 43.1,93.2 50.2,86.1 50.2,14.5 52.5,12.2 53.7,12.2 55.8,14.3 55.8,86.4 62.6,93.2 73.2,93.2 80.2,86.2 80.2,15.6 82.6,13.2 83.6,13.2 85.8,15.4 85.8,94.4 80.3,99.9 62.2,99.9 v60.1,97.8
  Bottom 0.1: 59.6,115.2 59.6,114.2 60.5,113.3 60.5,111.96 60.47,111.94 60.47,111.66 60.5,111.64 60.5,110.8 60.1,110.4 v60.1,97.8
  Bottom 0.2: U$1.4 59.6,115.2
49  (via drill 0.2)
  Top 0.1: J2.3 39.9,107.3 37.3,109.9 21.6,109.9 10.8,99.1 10.8,10.9 17.9,3.8 28.3,3.8 35.2,10.7 35.2,81.6 37.4,83.8 38.4,83.8 40.8,81.4 40.8,9.8 47.8,2.8 58.4,2.8 65.2,9.6 65.2,81.7 67.3,83.8 68.5,83.8 70.8,81.5 70.8,10.9 77.9,3.8 88.3,3.8 95.2,10.7 95.2,99.1 85,109.3 63.3,109.3 v60.8,111.8
  Bottom 0.1: 59.9,115.2 59.9,114.18 60.8,113.28 v60.8,111.8
  Bottom 0.2: U$1.3 59.9,115.2
50  (via drill 0.2)
  Top 0.1: J2.2 40.2,99.4 36.3,95.5 21.6,95.5 20.4,94.3 20.4,15.7 22.7,13.4 23.5,13.4 25.6,15.5 25.6,86.4 32.6,93.4 43.2,93.4 50.4,86.2 50.4,14.6 52.6,12.4 53.6,12.4 55.6,14.4 55.6,86.5 62.5,93.4 73.3,93.4 80.4,86.3 80.4,15.7 82.7,13.4 83.5,13.4 85.6,15.5 85.6,94.2 80.1,99.7 62.7,99.7 v60.8,97.8
  Bottom 0.1: 60.2,115.2 60.2,114.17 61.13,113.24 61.13,111.66 60.8,111.34 v60.8,97.8
  Bottom 0.2: U$1.2 60.2,115.2
51  (via drill 0.2)
  Top 0.1: J2.1 40.5,107.1 37.5,110.1 21.52,110.1 10.6,99.18 10.6,10.82 17.82,3.6 28.38,3.6 35.4,10.62 35.4,81.52 37.48,83.6 38.32,83.6 40.6,81.32 40.6,9.72 47.72,2.6 58.48,2.6 65.4,9.52 65.4,81.62 67.38,83.6 68.42,83.6 70.6,81.42 70.6,10.82 77.82,3.6 88.38,3.6 95.4,10.62 95.4,99.18 85.08,109.5 63.8,109.5 v61.5,111.8
  Bottom 0.1: v61.5,111.8 61.5,113.2 60.5,114.2 60.5,115.25
  Bottom 0.2: 60.5,115.25 U$1.1
GND
  pour Top: 109,-3 109,115 63,115 63,125 43,125 43,115 -5,115 -5,-3

## Text on the board
tPlace: Eccosorb Filter XLD250 v1 -- NGH | 1 | 50